# EAGLE board control_print (EAGLE 7.7.0)
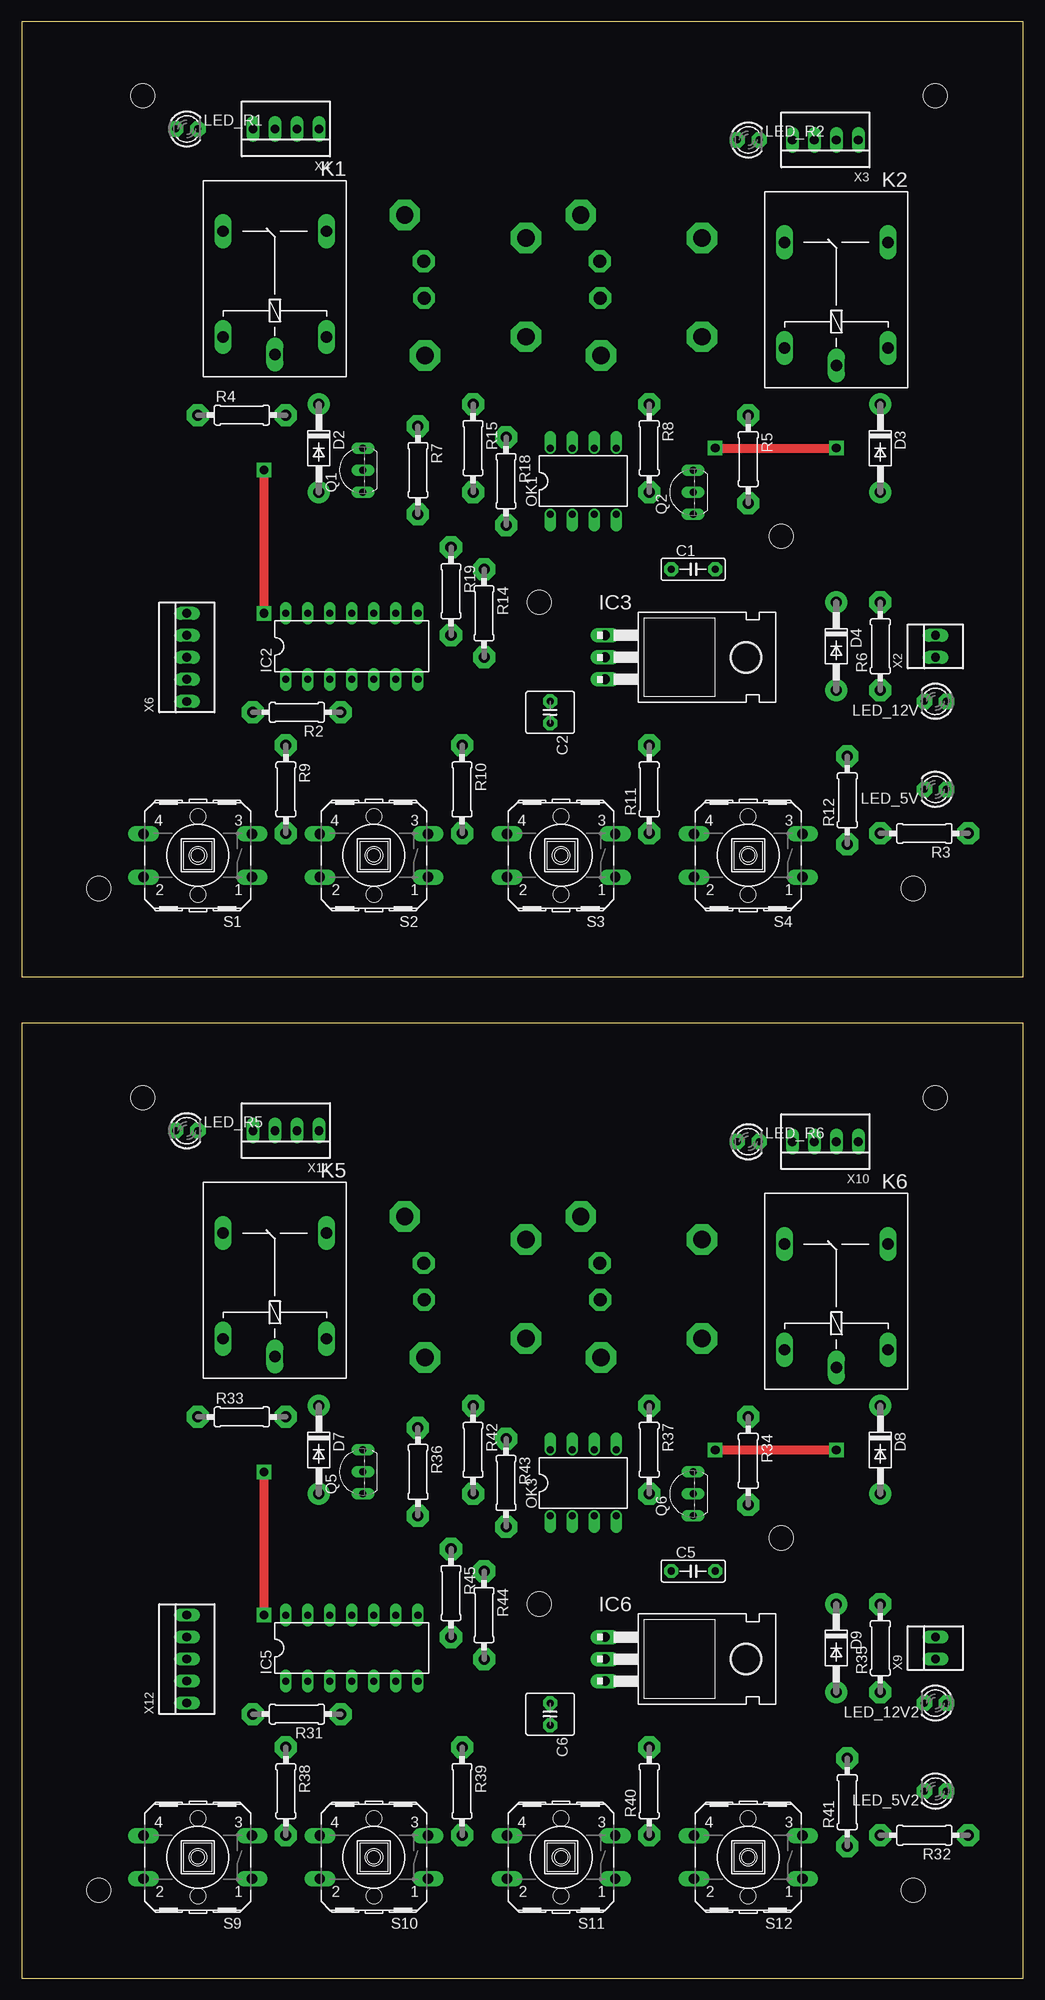
[diagram p0: board, top side]
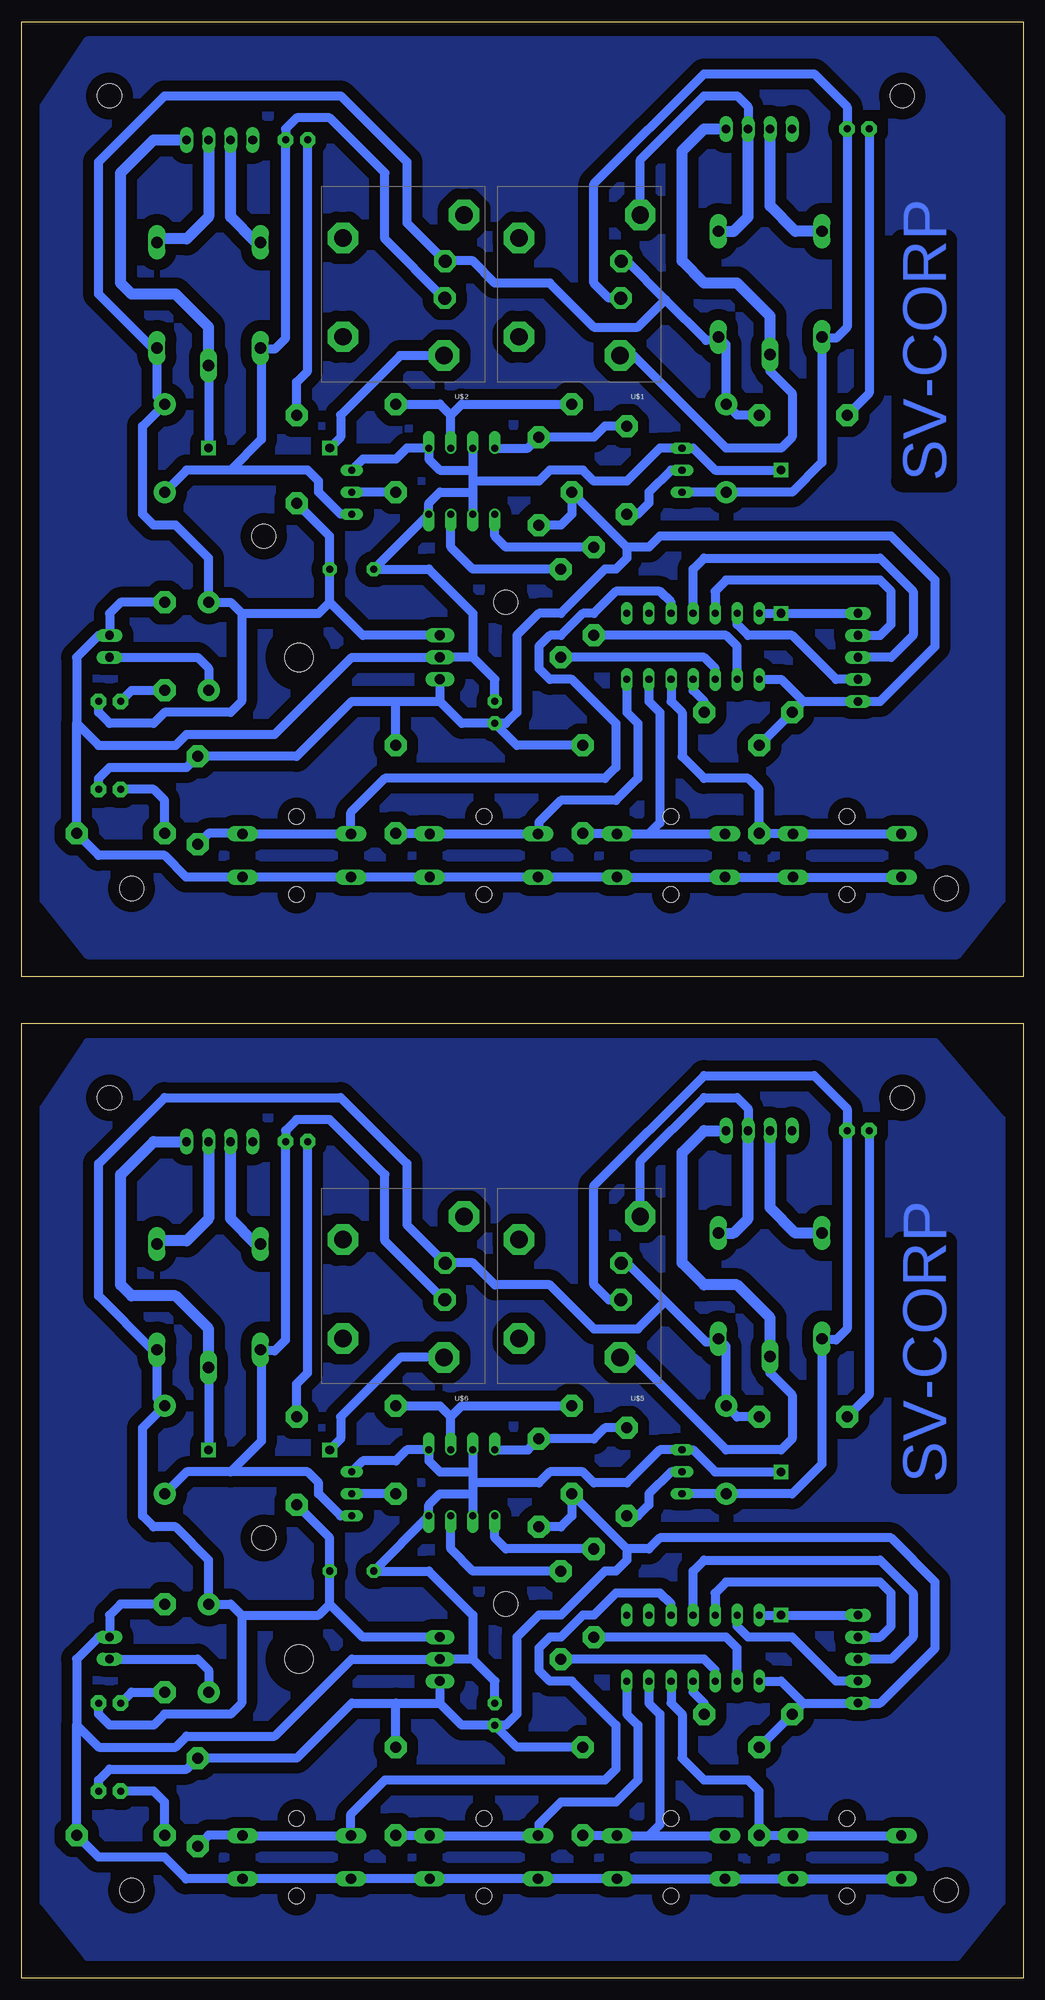
[diagram p1: board, bottom side, seen from below]

Size 115.55 x 225.73 mm. Coordinates in mm from the lower left corner, seen from the top.
Outline: 0,115.57 115.55,115.57 115.55,225.73 0,225.73 0,115.57
Outline: 0,0 115.55,0 115.55,110.16 0,110.16 0,0
Copper layers (1*16): Top 0.035mm / dielectric 1.5mm / Bottom 0.035mm
Design rules "default": minimum track width 10mil, minimum drill 24mil, track to track 8mil, track to pad 8mil, pad to pad 8mil, via to via 8mil, smd to smd 8mil, copper to edge 40mil, drill to drill 8mil, minimum pad ring 10mil, minimum via ring 8mil, stop-mask expansion 4mil, vias tented up to drill 0mil, thermal gap 10mil
Holes 2.8 mm at 8.89,125.73 102.87,125.73 13.97,217.17 105.41,217.17 59.69,158.75 87.63,166.37 8.89,10.16 102.87,10.16 13.97,101.6 105.41,101.6 59.69,43.18 87.63,50.8

## Footprints (pad centres in the part's own frame; a part is rotated, then mirrored left to right if it is on the bottom)
C5B2.5 = drill 0.813 pad 1.6 octagon: 1 -2.54,0; 2 2.54,0
C2.5-6 = drill 0.813 pad 1.6 octagon: 1 -1.27,0; 2 1.27,0
DO41-10 = drill 1.27 pad 2.54: A 5.08,0; C -5.08,0
DIL14 = drill 0.813 long: 1 -7.62,-3.81; 2 -5.08,-3.81; 3 -2.54,-3.81; 4 0,-3.81; 5 2.54,-3.81; 6 5.08,-3.81; 7 7.62,-3.81; 8 7.62,3.81; 9 5.08,3.81; 10 2.54,3.81; 11 0,3.81; 12 -2.54,3.81; 13 -5.08,3.81; 14 -7.62,3.81
TO220H = drill 1.118 long: 1 -2.54,-10.16; 2 0,-10.16; 3 2.54,-10.16 | hole 3.302: 0,6.096
G5LE = drill 1.321 long: 1 -7.493,-5.969; 2 -7.493,5.969; O 4.699,5.969; P -9.525,0; S 4.699,-5.969
LED3MM = drill 0.813 pad 1.778 octagon: A -1.27,0; K 1.27,0
DIL08 = drill 0.813 offset: 1 -3.81,-3.81; 2 -1.27,-3.81; 3 1.27,-3.81; 4 3.81,-3.81; 5 3.81,3.81; 6 1.27,3.81; 7 -1.27,3.81; 8 -3.81,3.81
TO92-EBC = drill 0.813 long: B 0,-1.27; C -2.54,-1.27; E 2.54,-1.27
0207/10 = drill 1.27 pad 2.54 octagon: 1 -5.08,0; 2 5.08,0
B3F-40XX = drill 1.194 long: 1 -6.248,2.489; 2 6.248,2.489; 3 -6.248,-2.489; 4 6.248,-2.489 | hole 1.803: 0,-4.496; 0,4.496
RL703 = drill 1.5 pad 2.5 octagon: 1 1.73,-5.643; 2 -2.51,-5.693 | drill 2 pad 3.5 octagon: C1 8.38,-5.543; C2 6.2,6.107; C3 -5.21,6.107; NO -7.86,-7.883
22-23-2021 = drill 1 long: 1 -1.27,0; 2 1.27,0
22-23-2041 = drill 1 long: 1 -3.81,0; 2 -1.27,0; 3 1.27,0; 4 3.81,0
22-23-2051 = drill 1 long: 1 -5.08,0; 2 -2.54,0; 3 0,0; 4 2.54,0; 5 5.08,0

## Placement (x,y rotation side)
C1  1000uf  [C5B2.5]  77.47,162.56 0 top
C2  100nf  [C2.5-6]  60.96,146.05 270 top
C5  1000uf  [C5B2.5]  77.47,46.99 0 top
C6  100nf  [C2.5-6]  60.96,30.48 270 top
D2  1N4004  [DO41-10]  34.29,176.53 270 top
D3  1N4004  [DO41-10]  99.06,176.53 270 top
D4  1N4004  [DO41-10]  93.98,153.67 270 top
D7  1N4004  [DO41-10]  34.29,60.96 270 top
D8  1N4004  [DO41-10]  99.06,60.96 270 top
D9  1N4004  [DO41-10]  93.98,38.1 270 top
IC2  PIC16F676P  [DIL14]  38.1,153.67 0 top
IC3  7805T  [TO220H]  77.47,152.4 270 top
IC5  PIC16F676P  [DIL14]  38.1,38.1 0 top
IC6  7805T  [TO220H]  77.47,36.83 270 top
K1  G5L  [G5LE]  29.21,196.85 90 top
K2  G5L  [G5LE]  93.98,195.58 90 top
K5  G5L  [G5LE]  29.21,81.28 90 top
K6  G5L  [G5LE]  93.98,80.01 90 top
LED_5V  [LED3MM]  105.41,137.16 180 top
LED_5V2  [LED3MM]  105.41,21.59 180 top
LED_12V  [LED3MM]  105.41,147.32 180 top
LED_12V2  [LED3MM]  105.41,31.75 180 top
LED_R1  [LED3MM]  19.05,213.36 0 top
LED_R2  [LED3MM]  83.82,212.09 0 top
LED_R5  [LED3MM]  19.05,97.79 0 top
LED_R6  [LED3MM]  83.82,96.52 0 top
OK1  PC827  [DIL08]  64.77,172.72 0 top
OK3  PC827  [DIL08]  64.77,57.15 0 top
Q1  BC547  [TO92-EBC]  38.1,173.99 90 top
Q2  BC547  [TO92-EBC]  76.2,171.45 90 top
Q5  BC547  [TO92-EBC]  38.1,58.42 90 top
Q6  BC547  [TO92-EBC]  76.2,55.88 90 top
R2  1K  [0207/10]  31.75,146.05 180 top
R3  330  [0207/10]  104.14,132.08 180 top
R4  1k5  [0207/10]  25.4,180.34 0 top
R5  1k5  [0207/10]  83.82,175.26 270 top
R6  1k5  [0207/10]  99.06,153.67 90 top
R7  1K  [0207/10]  45.72,173.99 270 top
R8  1k  [0207/10]  72.39,176.53 270 top
R9  4k7  [0207/10]  30.48,137.16 270 top
R10  4k7  [0207/10]  50.8,137.16 270 top
R11  4k7  [0207/10]  72.39,137.16 90 top
R12  4k7  [0207/10]  95.25,135.89 90 top
R14  1k  [0207/10]  53.34,157.48 270 top
R15  1k  [0207/10]  52.07,176.53 270 top
R18  1k  [0207/10]  55.88,172.72 270 top
R19  1k  [0207/10]  49.53,160.02 270 top
R31  1K  [0207/10]  31.75,30.48 180 top
R32  330  [0207/10]  104.14,16.51 180 top
R33  1k5  [0207/10]  25.4,64.77 0 top
R34  1k5  [0207/10]  83.82,59.69 270 top
R35  1k5  [0207/10]  99.06,38.1 90 top
R36  1K  [0207/10]  45.72,58.42 270 top
R37  1k  [0207/10]  72.39,60.96 270 top
R38  4k7  [0207/10]  30.48,21.59 270 top
R39  4k7  [0207/10]  50.8,21.59 270 top
R40  4k7  [0207/10]  72.39,21.59 90 top
R41  4k7  [0207/10]  95.25,20.32 90 top
R42  1k  [0207/10]  52.07,60.96 270 top
R43  1k  [0207/10]  55.88,57.15 270 top
R44  1k  [0207/10]  53.34,41.91 270 top
R45  1k  [0207/10]  49.53,44.45 270 top
S1  [B3F-40XX]  20.32,129.54 180 top
S2  [B3F-40XX]  40.64,129.54 180 top
S3  [B3F-40XX]  62.23,129.54 180 top
S4  [B3F-40XX]  83.82,129.54 180 top
S9  [B3F-40XX]  20.32,13.97 180 top
S10  [B3F-40XX]  40.64,13.97 180 top
S11  [B3F-40XX]  62.23,13.97 180 top
S12  [B3F-40XX]  83.82,13.97 180 top
U$1  RL703  [RL703]  52.07,195.58 270 top
U$2  RL703  [RL703]  72.39,195.58 270 top
U$5  RL703  [RL703]  52.07,80.01 270 top
U$6  RL703  [RL703]  72.39,80.01 270 top
X2  22-23-2021  [22-23-2021]  105.41,153.67 90 top
X3  22-23-2041  [22-23-2041]  92.71,212.09 180 top
X4  22-23-2041  [22-23-2041]  30.48,213.36 180 top
X6  22-23-2051  [22-23-2051]  19.05,152.4 90 top
X9  22-23-2021  [22-23-2021]  105.41,38.1 90 top
X10  22-23-2041  [22-23-2041]  92.71,96.52 180 top
X11  22-23-2041  [22-23-2041]  30.48,97.79 180 top
X12  22-23-2051  [22-23-2051]  19.05,36.83 90 top

## Library data of the parts
C1 C2 C5 C6 = capacitor-wima
D2-D4 D7-D9 = diode
IC2 IC5 = microchip; MF: MICROCHIP; MPN: PIC16F676-I/P; OC_FARNELL: 9760512; OC_NEWARK: 54K2829
IC3 IC6 = linear
K1 K2 K5 K6 = relay; OC_FARNELL: unknown; OC_NEWARK: unknown
LED_5V LED_5V2 LED_12V LED_12V2 LED_R1 LED_R2 LED_R5 LED_R6 = led
OK1 OK3 = optocoupler; OC_FARNELL: unknown; OC_NEWARK: unknown
Q1 Q2 Q5 Q6 = transistor-npn
R2-R12 R14 R15 R18 R19 R31-R45 = resistor
S1-S4 S9-S12 = switch-omron; MF: OMRON COMPONENTS USA; MPN: B3F-4000; OC_FARNELL: 176434; OC_NEWARK: 36K3105
U$1 U$2 U$5 U$6 = relay
X2 X9 = con-molex; MF: MOLEX; MPN: 22-23-2021; OC_FARNELL: 1462926; OC_NEWARK: 25C3832
X3 X4 X10 X11 = con-molex; MF: MOLEX; MPN: 22-23-2041; OC_FARNELL: 1462920; OC_NEWARK: 38C0355
X6 X12 = con-molex; MF: MOLEX; MPN: 22-23-2051; OC_FARNELL: 1462952; OC_NEWARK: 38C9178

## Nets
GND: C1.1 C2.1 IC2.14 IC3.2 OK1.2 OK1.4 OK1.5 OK1.7 Q1.E Q2.E R3.1 R6.2 S1.1 S1.2 S2.1 S2.2 S3.1 S3.2 S4.1 S4.2 X2.2 X6.5
GND2: C5.1 C6.1 IC5.14 IC6.2 OK3.2 OK3.4 OK3.5 OK3.7 Q5.E Q6.E R32.1 R35.2 S9.1 S9.2 S10.1 S10.2 S11.1 S11.2 S12.1 S12.2 X9.2 X12.5
N$6: IC2.11 X6.3
N$7: IC2.13 X6.2
N$8: IC2.12 X6.4
N$9: IC2.4 R2.1
N$10: Q1.B R7.2
N$11: D2.A K1.2 LED_R1.K Q1.C U$1.1
N$12: D3.A K2.2 LED_R2.K Q2.C U$2.1
N$13: Q2.B R8.2
N$15: K2.P U$2.C1 X3.1
N$16: K2.S X3.2
N$17: K2.O X3.3
N$18: K1.S U$1.NO X4.2
N$19: K1.P U$1.C1 X4.1
N$20: K1.O X4.3
N$21: D4.A X2.1
N$22: LED_5V.K R3.2
N$23: LED_R2.A R5.1
N$25: IC2.6 R10.2 S2.3 S2.4
N$26: LED_R1.A R4.1
N$27: IC2.7 R11.1 S3.3 S3.4
N$28: IC2.10 R12.1 S4.3 S4.4
N$30: LED_12V.K R6.1
N$34: IC2.5 R9.2 S1.3 S1.4
N$37: C1.2 D2.C D3.C D4.C IC3.1 K1.1 K2.1 LED_12V.A R4.2 R5.2 U$1.2 U$2.2
N$38: OK1.8 R7.1 R18.1
N$39: OK1.6 R8.1 R15.1
N$40: OK1.3 R14.1
N$41: OK1.1 R19.1
N$59: IC5.11 X12.3
N$60: IC5.13 X12.2
N$61: IC5.12 X12.4
N$62: IC5.4 R31.1
N$63: Q5.B R36.2
N$64: D7.A K5.2 LED_R5.K Q5.C U$5.1
N$65: D8.A K6.2 LED_R6.K Q6.C U$6.1
N$66: Q6.B R37.2
N$67: K6.P U$6.C1 X10.1
N$68: K6.S X10.2
N$69: K6.O X10.3
N$70: K5.S U$5.NO X11.2
N$71: K5.P U$5.C1 X11.1
N$72: K5.O X11.3
N$73: LED_R6.A R34.1
N$74: LED_R5.A R33.1
N$75: IC5.6 R39.2 S10.3 S10.4
N$76: IC5.7 R40.1 S11.3 S11.4
N$77: IC5.10 R41.1 S12.3 S12.4
N$78: LED_12V2.K R35.1
N$79: IC5.5 R38.2 S9.3 S9.4
N$80: D9.A X9.1
N$81: C5.2 D7.C D8.C D9.C IC6.1 K5.1 K6.1 LED_12V2.A R33.2 R34.2 U$5.2 U$6.2
N$83: LED_5V2.K R32.2
N$84: OK3.8 R36.1 R43.1
N$85: OK3.6 R37.1 R42.1
N$86: OK3.3 R44.1
N$87: OK3.1 R45.1
RELAY1: IC2.2 R19.2
RELAY2: IC2.3 R14.2
RELAY5: IC5.2 R45.2
RELAY6: IC5.3 R44.2
VCC: C2.2 IC2.1 IC3.3 LED_5V.A R2.2 R9.1 R10.1 R11.2 R12.2 R15.2 R18.2 X6.1
VCC2: C6.2 IC5.1 IC6.3 LED_5V2.A R31.2 R38.1 R39.1 R40.2 R41.2 R42.2 R43.2 X12.1

## Tracks (layer width: path | path; a pad name or v marks a point on that pad's centre or on a via)
GND  (via drill 1 pad 1.68)
  Top 1.016: v27.94,173.99 v27.94,157.48
  Bottom 1.016: R6.2 104.14,158.75 105.41,157.48 X2.2 106.68,154.94 109.22,152.4 109.22,144.78 | S2.2 S2.1 S3.2 S3.1 | S2.2 35.61,127.05 35.56,127 35.61,127 S2.2 | S2.2 S1.1 S1.2 | S3.1 68.53,127.05 68.58,127 68.53,127 S3.1 | S3.1 S4.2 S4.1 | S4.1 91.39,127.05 91.44,127 90.12,127 S4.1 | IC2.14 v27.94,157.48 X6.5 | OK1.7 63.5,173.99 | 63.5,173.99 63.5,172.72 | 63.5,172.72 63.5,171.45 | 63.5,171.45 OK1.2 | 63.5,171.45 67.31,171.45 68.58,170.18 OK1.4 C1.1 68.58,162.56 63.5,157.48 63.5,152.4 | 63.5,173.99 67.31,173.99 68.58,175.26 OK1.5 71.12,176.53 72.39,175.26 76.2,175.26 Q2.E | 63.5,172.72 55.88,172.72 54.61,173.99 50.8,173.99 49.53,172.72 45.72,172.72 41.91,176.53 Q1.E 38.1,176.53 35.56,173.99 v27.94,173.99 | 63.5,152.4 IC3.2 77.47,152.4 86.36,143.51 96.52,143.51 97.79,142.24 106.68,142.24 109.22,144.78 | 109.22,144.78 R3.1 106.68,129.54 99.06,129.54 96.57,127.05 S4.1 | C2.1 60.96,149.86 63.5,152.4
GND2  (via drill 1 pad 1.68)
  Top 1.016: v27.94,58.42 v27.94,41.91
  Bottom 1.016: R35.2 104.14,43.18 105.41,41.91 X9.2 106.68,39.37 109.22,36.83 109.22,29.21 | S10.2 S10.1 S11.2 S11.1 | S10.2 35.61,11.48 35.56,11.43 35.61,11.43 S10.2 | S10.2 S9.1 S9.2 | S11.1 68.53,11.48 68.58,11.43 68.53,11.43 S11.1 | S11.1 S12.2 S12.1 | S12.1 91.39,11.48 91.44,11.43 90.12,11.43 S12.1 | IC5.14 v27.94,41.91 X12.5 | OK3.7 63.5,58.42 | 63.5,58.42 63.5,57.15 | 63.5,57.15 63.5,55.88 | 63.5,55.88 OK3.2 | 63.5,55.88 67.31,55.88 68.58,54.61 OK3.4 C5.1 68.58,46.99 63.5,41.91 63.5,36.83 | 63.5,58.42 67.31,58.42 68.58,59.69 OK3.5 71.12,60.96 72.39,59.69 76.2,59.69 Q6.E | 63.5,57.15 55.88,57.15 54.61,58.42 50.8,58.42 49.53,57.15 45.72,57.15 41.91,60.96 Q5.E 38.1,60.96 35.56,58.42 v27.94,58.42 | 63.5,36.83 IC6.2 77.47,36.83 86.36,27.94 96.52,27.94 97.79,26.67 106.68,26.67 109.22,29.21 | 109.22,29.21 R32.1 106.68,13.97 99.06,13.97 96.57,11.48 S12.1 | C6.1 60.96,34.29 63.5,36.83
N$6
  Bottom 1.016: IC2.11 38.1,162.56 36.83,163.83 16.51,163.83 12.7,160.02 12.7,154.94 15.24,152.4 X6.3
N$7
  Bottom 1.016: X6.2 21.59,149.86 26.67,154.94 31.75,154.94 33.02,156.21 IC2.13
N$8
  Bottom 1.016: X6.4 16.51,154.94 15.24,156.21 15.24,160.02 16.51,161.29 34.29,161.29 35.56,160.02 IC2.12
N$9
  Bottom 1.016: IC2.4 38.1,148.59 36.83,147.32 R2.1
N$10
  Bottom 1.016: Q1.B 40.64,173.99 43.18,171.45 43.18,170.18 44.45,168.91 R7.2
N$11
  Bottom 1.016: U$1.1 47.8,193.85 49.53,195.58 49.53,207.01 36.83,219.71 24.13,219.71 20.32,215.9 LED_R1.K 20.32,190.5 21.59,189.23 23.11,189.23 K1.2 23.24,174.88 26.67,171.45 D2.A Q1.C
N$12
  Bottom 1.016: 87.88,187.96 86.36,187.96 85.09,189.23 LED_R2.K 85.09,213.36 83.82,214.63 80.01,214.63 73.66,208.28 73.66,200.66 66.85,193.85 U$2.1 | 87.88,187.96 K2.2 | 91.44,173.99 82.55,173.99 81.28,172.72 81.28,171.45 78.74,168.91 Q2.C | 87.88,187.96 87.88,177.55 91.44,173.99 | 91.44,173.99 96.52,173.99 D3.A
N$13
  Bottom 1.016: R8.2 Q2.B
N$15  (via drill 1 pad 1.68)
  Top 1.016: v80.01,176.53 v93.98,176.53
  Bottom 1.016: K2.P v93.98,176.53 | U$2.C1 71.88,187.2 78.74,180.34 78.74,177.8 v80.01,176.53
  Bottom 1.27: K2.P 93.98,190.5 97.79,194.31 102.87,194.31 104.14,195.58 104.14,208.28 100.33,212.09 X3.1
N$16
  Bottom 1.27: X3.2 93.98,203.2 96.52,200.66 99.57,200.66 K2.S
N$17
  Bottom 1.27: K2.O 88.52,200.28 91.44,203.2 X3.3
N$18
  Bottom 1.016: U$1.NO 44.19,209.81 36.83,217.17 33.02,217.17 31.75,215.9 X4.2
  Bottom 1.27: K1.S 33.4,201.55 31.75,203.2 X4.2
N$19
  Bottom 1.016: U$1.C1 44.96,187.2 34.29,176.53 27.94,176.53 26.67,177.8 26.67,182.88 29.21,185.42 K1.P
  Bottom 1.27: K1.P 29.21,191.77 33.02,195.58 36.83,195.58 39.37,198.12 39.37,210.82 36.83,213.36 X4.1
N$20
  Bottom 1.27: X4.3 29.21,204.47 26.29,201.55 K1.O
N$21
  Bottom 1.016: X2.1 95.25,152.4 93.98,151.13 D4.A
N$22
  Bottom 1.016: R3.2 99.06,135.89 100.33,137.16 LED_5V.K
N$23
  Bottom 1.016: R5.1 83.82,184.15 82.55,185.42 LED_R2.A
N$24
  pour Bottom (isolate 1.27): 10.16,223.52 107.95,223.52 113.03,215.9 113.03,124.46 107.95,118.11 7.62,118.11 2.54,124.46 2.54,214.63
N$25
  Bottom 1.016: 43.18,132.03 S2.3 50.75,132.03 R10.2 | 43.18,132.03 S2.4 35.61,132.08 35.56,132.08 | IC2.6 43.18,147.32 41.91,146.05 41.91,133.3 43.18,132.03
N$26
  Bottom 1.016: LED_R1.A 17.78,182.88 R4.1
N$27
  Bottom 1.016: R11.1 68.53,132.08 S3.3 S3.4 55.88,132.13 55.88,133.35 53.34,135.89 46.99,135.89 44.45,138.43 44.45,144.78 45.72,146.05 IC2.7
N$28
  Bottom 1.016: R12.1 93.98,132.08 90.12,132.08 S4.3 S4.4 77.57,134.52 73.66,138.43 48.26,138.43 46.99,139.7 46.99,144.78 52.07,149.86 54.61,149.86 55.88,151.13 55.88,153.67 54.61,154.94 53.34,154.94 50.8,157.48 49.53,157.48 46.99,160.02 41.91,160.02 40.64,158.75 IC2.10
N$30
  Bottom 1.016: LED_12V.K 102.87,148.59 R6.1
N$34
  Bottom 1.016: S1.4 S1.3 30.43,132.03 R9.2 30.48,137.16 31.75,138.43 36.83,138.43 39.37,140.97 39.37,146.05 40.64,147.32 IC2.5
N$37
  Bottom 1.016: 90.17,157.48 91.44,158.75 D4.C 93.98,163.83 97.79,167.64 100.33,167.64 101.6,168.91 101.6,179.07 D3.C 99.95,182.5 K2.1 100.46,188.09 106.68,194.31 106.68,209.55 99.06,217.17 78.74,217.17 71.12,209.55 71.12,202.51 U$2.2 66.67,198.12 63.5,198.12 60.96,195.58 54.61,195.58 49.53,190.5 44.45,190.5 41.27,193.68 | 90.17,157.48 90.17,147.32 91.44,146.05 99.06,146.05 100.33,144.78 105.41,144.78 106.68,146.05 LED_12V.A | IC3.1 76.2,154.94 80.01,158.75 | 80.01,158.75 C1.2 80.01,166.37 R5.2 | 90.17,157.48 81.28,157.48 80.01,158.75 | 41.27,193.68 36.58,188.98 35.56,188.98 K1.1 34.29,188.47 D2.C 33.02,180.34 R4.2 | 41.27,193.68 45.72,198.12 46.35,198.12 U$1.2
N$38
  Bottom 1.016: OK1.8 57.15,176.53 R18.1 49.53,177.8 48.26,179.07 R7.1
N$39
  Bottom 1.016: OK1.6 66.04,180.34 | 66.04,180.34 64.77,181.61 R15.1 | R8.1 67.31,181.61 66.04,180.34
N$40
  Bottom 1.016: R14.1 63.5,162.56 66.04,165.1 OK1.3
N$41
  Bottom 1.016: R19.1 59.69,165.1 60.96,166.37 OK1.1
N$59
  Bottom 1.016: IC5.11 38.1,46.99 36.83,48.26 16.51,48.26 12.7,44.45 12.7,39.37 15.24,36.83 X12.3
N$60
  Bottom 1.016: X12.2 21.59,34.29 26.67,39.37 31.75,39.37 33.02,40.64 IC5.13
N$61
  Bottom 1.016: X12.4 16.51,39.37 15.24,40.64 15.24,44.45 16.51,45.72 34.29,45.72 35.56,44.45 IC5.12
N$62
  Bottom 1.016: IC5.4 38.1,33.02 36.83,31.75 R31.1
N$63
  Bottom 1.016: Q5.B 40.64,58.42 43.18,55.88 43.18,54.61 44.45,53.34 R36.2
N$64
  Bottom 1.016: U$5.1 47.8,78.28 49.53,80.01 49.53,91.44 36.83,104.14 24.13,104.14 20.32,100.33 LED_R5.K 20.32,74.93 21.59,73.66 23.11,73.66 K5.2 23.24,59.31 26.67,55.88 D7.A Q5.C
N$65
  Bottom 1.016: 87.88,72.39 86.36,72.39 85.09,73.66 LED_R6.K 85.09,97.79 83.82,99.06 80.01,99.06 73.66,92.71 73.66,85.09 66.85,78.28 U$6.1 | 87.88,72.39 K6.2 | 91.44,58.42 82.55,58.42 81.28,57.15 81.28,55.88 78.74,53.34 Q6.C | 87.88,72.39 87.88,61.98 91.44,58.42 | 91.44,58.42 96.52,58.42 D8.A
N$66
  Bottom 1.016: R37.2 Q6.B
N$67  (via drill 1 pad 1.68)
  Top 1.016: v80.01,60.96 v93.98,60.96
  Bottom 1.016: K6.P v93.98,60.96 | U$6.C1 71.88,71.63 78.74,64.77 78.74,62.23 v80.01,60.96
  Bottom 1.27: K6.P 93.98,74.93 97.79,78.74 102.87,78.74 104.14,80.01 104.14,92.71 100.33,96.52 X10.1
N$68
  Bottom 1.27: X10.2 93.98,87.63 96.52,85.09 99.57,85.09 K6.S
N$69
  Bottom 1.27: K6.O 88.52,84.71 91.44,87.63 X10.3
N$70
  Bottom 1.016: U$5.NO 44.19,94.24 36.83,101.6 33.02,101.6 31.75,100.33 X11.2
  Bottom 1.27: K5.S 33.4,85.98 31.75,87.63 X11.2
N$71
  Bottom 1.016: U$5.C1 44.96,71.63 34.29,60.96 27.94,60.96 26.67,62.23 26.67,67.31 29.21,69.85 K5.P
  Bottom 1.27: K5.P 29.21,76.2 33.02,80.01 36.83,80.01 39.37,82.55 39.37,95.25 36.83,97.79 X11.1
N$72
  Bottom 1.27: X11.3 29.21,88.9 26.29,85.98 K5.O
N$73
  Bottom 1.016: R34.1 83.82,68.58 82.55,69.85 LED_R6.A
N$74
  Bottom 1.016: LED_R5.A 17.78,67.31 R33.1
N$75
  Bottom 1.016: 43.18,16.46 S10.3 50.75,16.46 R39.2 | 43.18,16.46 S10.4 35.61,16.51 35.56,16.51 | IC5.6 43.18,31.75 41.91,30.48 41.91,17.73 43.18,16.46
N$76
  Bottom 1.016: R40.1 68.53,16.51 S11.3 S11.4 55.88,16.56 55.88,17.78 53.34,20.32 46.99,20.32 44.45,22.86 44.45,29.21 45.72,30.48 IC5.7
N$77
  Bottom 1.016: R41.1 93.98,16.51 90.12,16.51 S12.3 S12.4 77.57,18.95 73.66,22.86 48.26,22.86 46.99,24.13 46.99,29.21 52.07,34.29 54.61,34.29 55.88,35.56 55.88,38.1 54.61,39.37 53.34,39.37 50.8,41.91 49.53,41.91 46.99,44.45 41.91,44.45 40.64,43.18 IC5.10
N$78
  Bottom 1.016: LED_12V2.K 102.87,33.02 R35.1
N$79
  Bottom 1.016: S9.4 S9.3 30.43,16.46 R38.2 30.48,21.59 31.75,22.86 36.83,22.86 39.37,25.4 39.37,30.48 40.64,31.75 IC5.5
N$80
  Bottom 1.016: X9.1 95.25,36.83 93.98,35.56 D9.A
N$81
  Bottom 1.016: 90.17,41.91 91.44,43.18 D9.C 93.98,48.26 97.79,52.07 100.33,52.07 101.6,53.34 101.6,63.5 D8.C 99.95,66.93 K6.1 100.46,72.52 106.68,78.74 106.68,93.98 99.06,101.6 78.74,101.6 71.12,93.98 71.12,86.94 U$6.2 66.67,82.55 63.5,82.55 60.96,80.01 54.61,80.01 49.53,74.93 44.45,74.93 41.27,78.11 | 90.17,41.91 90.17,31.75 91.44,30.48 99.06,30.48 100.33,29.21 105.41,29.21 106.68,30.48 LED_12V2.A | IC6.1 76.2,39.37 80.01,43.18 | 80.01,43.18 C5.2 80.01,50.8 R34.2 | 90.17,41.91 81.28,41.91 80.01,43.18 | 41.27,78.11 36.58,73.41 35.56,73.41 K5.1 34.29,72.9 D7.C 33.02,64.77 R33.2 | 41.27,78.11 45.72,82.55 46.35,82.55 U$5.2
N$82
  pour Bottom (isolate 1.27): 10.16,107.95 107.95,107.95 113.03,100.33 113.03,8.89 107.95,2.54 7.62,2.54 2.54,8.89 2.54,99.06
N$83
  Bottom 1.016: R32.2 99.06,20.32 100.33,21.59 LED_5V2.K
N$84
  Bottom 1.016: OK3.8 57.15,60.96 R43.1 49.53,62.23 48.26,63.5 R36.1
N$85
  Bottom 1.016: OK3.6 66.04,64.77 | 66.04,64.77 64.77,66.04 R42.1 | R37.1 67.31,66.04 66.04,64.77
N$86
  Bottom 1.016: R44.1 63.5,46.99 66.04,49.53 OK3.3
N$87
  Bottom 1.016: R45.1 59.69,49.53 60.96,50.8 OK3.1
RELAY1
  Bottom 1.016: IC2.2 33.02,153.67 34.29,154.94 R19.2
RELAY2
  Bottom 1.016: IC2.3 35.56,151.13 36.83,152.4 R14.2
RELAY5
  Bottom 1.016: IC5.2 33.02,38.1 34.29,39.37 R45.2
RELAY6
  Bottom 1.016: IC5.3 35.56,35.56 36.83,36.83 R44.2
VCC
  Bottom 1.016: IC3.3 67.31,147.32 | 72.39,147.32 67.31,147.32 | R11.2 72.39,147.32 | R18.2 53.34,167.64 52.07,168.91 R15.2 45.72,165.1 | 25.4,147.32 R2.2 R9.1 | IC2.1 27.94,149.86 25.4,147.32 | 72.39,147.32 77.47,147.32 83.82,140.97 R12.2 96.52,139.7 105.41,139.7 106.68,138.43 LED_5V.A | 25.4,147.32 X6.1 16.51,147.32 10.16,153.67 10.16,161.29 15.24,166.37 41.91,166.37 43.18,165.1 45.72,165.1 | R10.1 58.42,142.24 C2.2 | C2.2 64.77,144.78 67.31,147.32 | 45.72,165.1 45.72,163.83 46.99,162.56 48.26,162.56 53.34,157.48 55.88,157.48 58.42,154.94 58.42,146.05 59.69,144.78 C2.2
VCC2
  Bottom 1.016: IC6.3 67.31,31.75 | 72.39,31.75 67.31,31.75 | R40.2 72.39,31.75 | R43.2 53.34,52.07 52.07,53.34 R42.2 45.72,49.53 | 25.4,31.75 R31.2 R38.1 | IC5.1 27.94,34.29 25.4,31.75 | 72.39,31.75 77.47,31.75 83.82,25.4 R41.2 96.52,24.13 105.41,24.13 106.68,22.86 LED_5V2.A | 25.4,31.75 X12.1 16.51,31.75 10.16,38.1 10.16,45.72 15.24,50.8 41.91,50.8 43.18,49.53 45.72,49.53 | R39.1 58.42,26.67 C6.2 | C6.2 64.77,29.21 67.31,31.75 | 45.72,49.53 45.72,48.26 46.99,46.99 48.26,46.99 53.34,41.91 55.88,41.91 58.42,39.37 58.42,30.48 59.69,29.21 C6.2

## Text on the board
Bottom: SV-CORP | SV-CORP